# Altium PCB PCB尺子2.PcbDoc (part 1 of 3)
Units mm, origin at the board's own origin, x right, y up, seen from the top; angles counter-clockwise.
Board outline 210 x 35 mm, 2 copper layers (Top Layer, Bottom Layer); 21 components, 0 nets, 1047 pads, 0 vias.
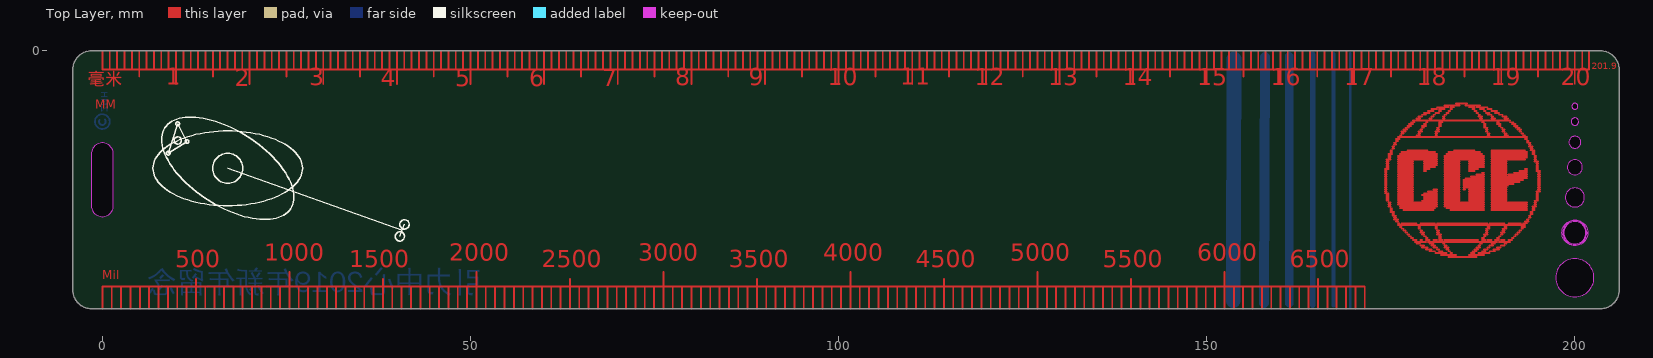
[diagram p0: Top Layer view]
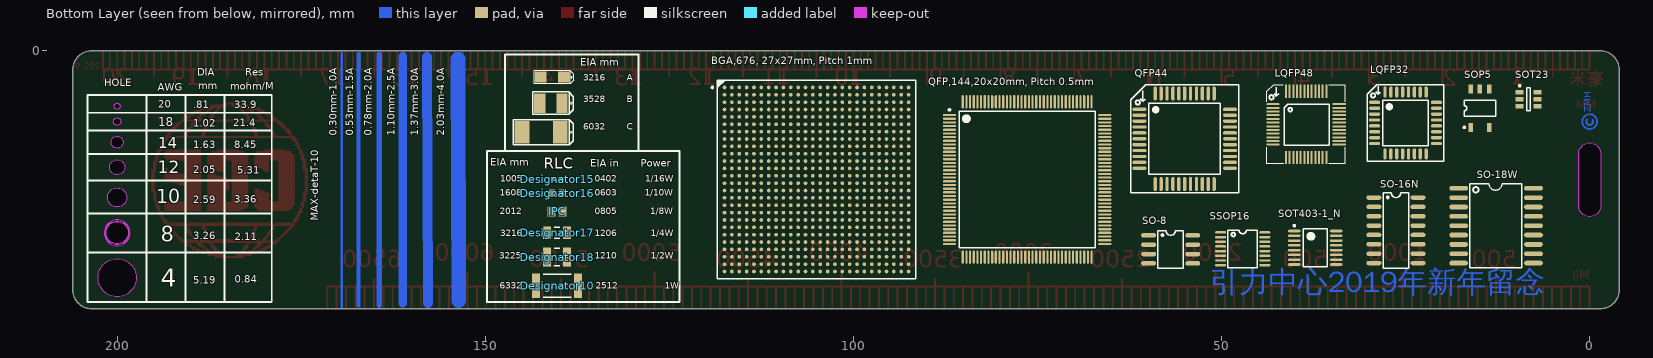
[diagram p1: Bottom Layer view, seen from below]

## Layer stack, top to bottom
Top Solder: solder mask 0.0102, Solder Resist, Dk 3.5
Top Layer: signal copper 0.0356
Dielectric 1: dielectric 0.32, FR-4, Dk 4.8
Bottom Layer: signal copper 0.0356
Bottom Solder: solder mask 0.0102, Solder Resist, Dk 3.5

## Board outline
-4,-32.5 -4,-2.5 cw(c-1.5,-2.5) -1.5,0 203.5,0 cw(c203.5,-2.5) 206,-2.5 206,-32.5 cw(c203.5,-32.5) 203.5,-35 -1.5,-35 cw(c-1.5,-32.5)
cut-out: -1.5,-21 ccw(c0,-21) 1.5,-21 1.5,-14 ccw(c0,-14) -1.5,-14
cut-out: 197.405,-30.8 ccw(c200,-30.8) 200,-33.395 ccw(c200,-30.8) 202.595,-30.8 ccw(c200,-30.8) 200,-28.205 ccw(c200,-30.8)
cut-out: 201.757,-24.73 cw(c200,-24.7) 201.757,-24.7 cw(c201.63,-24.7) 201.503,-24.7 ccw(c200,-24.7) 201.502,-24.725 cw(c201.63,-24.728) 201.757,-24.728 cw(c201.63,-24.728)
cut-out: 198.37,-24.7 ccw(c200,-24.7) 200,-26.33 ccw(c200,-24.7) 201.63,-24.7 ccw(c200,-24.7) 200,-23.07 ccw(c200,-24.7)
cut-out: 198.705,-19.9 ccw(c200,-19.9) 200,-21.195 ccw(c200,-19.9) 201.295,-19.9 ccw(c200,-19.9) 200,-18.605 ccw(c200,-19.9)
cut-out: 198.975,-15.8 ccw(c200,-15.8) 200,-16.825 ccw(c200,-15.8) 201.025,-15.8 ccw(c200,-15.8) 200,-14.775 ccw(c200,-15.8)
cut-out: 199.185,-12.4 ccw(c200,-12.4) 200,-13.215 ccw(c200,-12.4) 200.815,-12.4 ccw(c200,-12.4) 200,-11.585 ccw(c200,-12.4)
cut-out: 199.49,-9.6 ccw(c200,-9.6) 200,-10.11 ccw(c200,-9.6) 200.51,-9.6 ccw(c200,-9.6) 200,-9.09 ccw(c200,-9.6)
cut-out: 199.595,-7.525 ccw(c200,-7.525) 200,-7.93 ccw(c200,-7.525) 200.405,-7.525 ccw(c200,-7.525) 200,-7.12 ccw(c200,-7.525)
cut-out: 198.705,-19.9 ccw(c200,-19.9) 200,-21.195 ccw(c200,-19.9) 201.295,-19.9 ccw(c200,-19.9) 200,-18.605 ccw(c200,-19.9)
cut-out: 198.975,-15.8 ccw(c200,-15.8) 200,-16.825 ccw(c200,-15.8) 201.025,-15.8 ccw(c200,-15.8) 200,-14.775 ccw(c200,-15.8)
cut-out: 199.185,-12.4 ccw(c200,-12.4) 200,-13.215 ccw(c200,-12.4) 200.815,-12.4 ccw(c200,-12.4) 200,-11.585 ccw(c200,-12.4)
cut-out: 201.757,-24.73 cw(c200,-24.7) 201.757,-24.7 cw(c201.63,-24.7) 201.503,-24.7 ccw(c200,-24.7) 201.502,-24.725 cw(c201.63,-24.728) 201.757,-24.728 cw(c201.63,-24.728)
cut-out: 198.37,-24.7 ccw(c200,-24.7) 200,-26.33 ccw(c200,-24.7) 201.63,-24.7 ccw(c200,-24.7) 200,-23.07 ccw(c200,-24.7)
cut-out: 197.405,-30.8 ccw(c200,-30.8) 200,-33.395 ccw(c200,-30.8) 202.595,-30.8 ccw(c200,-30.8) 200,-28.205 ccw(c200,-30.8)
cut-out: -1.5,-21 ccw(c0,-21) 1.5,-21 1.5,-14 ccw(c0,-14) -1.5,-14
cut-out: 199.49,-9.6 ccw(c200,-9.6) 200,-10.11 ccw(c200,-9.6) 200.51,-9.6 ccw(c200,-9.6) 200,-9.09 ccw(c200,-9.6)
cut-out: 199.595,-7.525 ccw(c200,-7.525) 200,-7.93 ccw(c200,-7.525) 200.405,-7.525 ccw(c200,-7.525) 200,-7.12 ccw(c200,-7.525)

## Design rules (kind name [scope] priority, off if disabled: settings)
Clearance [All] p1: gap=0.254 ignorepadtopadclearanceinfootprint=FALSE except(0: Arc-Hole Track-Hole SMDPad-Hole THPad-Hole Via-Hole Fill-Hole Poly-Hole Region-Hole Text-Hole; 0.25: Arc-Via Track-Via; 0.55: Via-Via)
PolygonConnect [All] p1: connectstyle=Relief reliefconductorwidth=0.254 reliefentries=4 polygonreliefangle="90 Angle" airgapwidth=0.254
RoutingVias [All] p1: holewidth=0.711 width=1.27 viastyle="Through Hole" minholewidth=0.711 minwidth=1.27 maxholewidth=0.711 maxwidth=1.27
SolderMaskExpansion [All] p1: expansion=0.102
Width [All] p1: maxlimit=3 minlimit=0.2 preferedwidth=0.254
30 further rules are at their usual default settings.

## Components (designator, comment, footprint, x,y, rotation, side; value= is the part's Value field where it differs from the comment)
"BGA,676, 27x27mm, Pitch 1mm" "Comment" FG676 105,-17.457 r180 bottom
Designator10 "Comment" RESC6332 140.25,-31.9 r180 bottom
Designator15 "Comment" 0402 140.25,-17.4 r180 bottom
Designator16 "Comment" 1608[0603] 140.25,-19.3 r180 bottom
Designator17 "Comment" C1206 140.25,-24.7 r180 bottom
Designator18 "Comment" C1210 140.25,-28 r180 bottom
IPC "Comment" C0805 140.25,-21.8 r180 bottom
LQFP32 "Comment" LQFP32 25,-9.781 r180 bottom
LQFP48 "Comment" LQFP48 38.5,-9.981 r180 bottom
QFP44 "Comment" QFP44 55,-11.931 r180 bottom
"QFP,144,20x20mm, Pitch 0.5mm" "Comment" TQ144_N 76.4,-17.457 r180 bottom
SO-8 "Comment" SO-8 56.9,-26.951 r180 bottom
SO-16N "Comment" SO-16N 26.3,-24.36 r180 bottom
SO-18W "Comment" SO-18W 12.705,-23.738 r180 bottom
SOP5 "Comment" SOP5(6) 14.9,-7.781 r180 bottom
SOT23 "Comment" SOT23-6_N 8.304,-6.554 r180 bottom
SOT403-1_N "Comment" SOT403-1_N 37.263,-26.73 r180 bottom
SSOP16 "Comment" SSOP16-150mil-0.635mm 47.122,-26.875 r180 bottom
? "Comment" 钽电容A型 140.899,-3.557 r180 bottom
? "Comment" 钽电容B型 141.069,-7.1 r180 bottom
? "Comment" 钽电容C型 142.4,-11.05 r180 bottom

## Footprints (in the part's own frame and the unit in brackets; to place one, negate y for a bottom-side part, rotate by r counter-clockwise, add the part's x,y. Pads: shape width x height; smd on the part's side, far side on the other; paste and mask are expansions set on the pad)
0402 [mm] "Chip Capacitor, Body 1.0x0.5mm, IPC High Density"
  rect 0.6x0.5 smd: 1(-0.5,0) 2(0.5,0)
  body extent -0.55,-0.3 0.55,0.3, height 1.3
1608[0603] [mm] "Chip Capacitor, Body 1.6x0.8mm, IPC High Density"
  rect 0.8x0.9 smd: 1(-0.7,0) 2(0.7,0)
  body extent -0.87,-0.48 0.87,0.48, height 1.3
C0805 [mm] "Chip Capacitor, Body 2.0x1.3mm, IPC High Density"
  rect 1.1x1.4 smd: 1(-0.75,0) 2(0.75,0)
  body extent -1.1,-0.72 1.1,0.72, height 1.4
C1206 [mm] "Chip Capacitor, Body 3.2x1.6mm, IPC High Density"
  rect 1.1x1.7 smd: 1(-1.35,0) 2(1.35,0)
  silkscreen extent -0.4,-0.75 0.4,0.75, body extent -1.7,-0.9 1.7,0.9, height 1.3
C1210 [mm] "Chip Capacitor, Body 3.2x2.5mm, IPC High Density"
  rect 1.1x2.6 smd: 1(-1.35,0) 2(1.35,0)
  silkscreen extent -0.4,-1.2 0.4,1.2, body extent -1.7,-1.35 1.7,1.35, height 1.3
FG676 [mm] "BGA, 676-Leads, Body 27x27mm, Pitch 1mm"
  round 0.5 smd: A1(-12.5,12.5) A2(-11.5,12.5) A3(-10.5,12.5) A4(-9.5,12.5) A5(-8.5,12.5) A6(-7.5,12.5) A7(-6.5,12.5) A8(-5.5,12.5) A9(-4.5,12.5) A10(-3.5,12.5) A11(-2.5,12.5) A12(-1.5,12.5) A13(-0.5,12.5) A14(0.5,12.5) A15(1.5,12.5) A16(2.5,12.5) A17(3.5,12.5) A18(4.5,12.5) A19(5.5,12.5) A20(6.5,12.5) A21(7.5,12.5) A22(8.5,12.5) A23(9.5,12.5) A24(10.5,12.5) A25(11.5,12.5) A26(12.5,12.5) AA1(-12.5,-7.5) AA2(-11.5,-7.5) AA3(-10.5,-7.5) AA4(-9.5,-7.5) AA5(-8.5,-7.5) AA6(-7.5,-7.5) AA7(-6.5,-7.5) AA8(-5.5,-7.5) AA9(-4.5,-7.5) AA10(-3.5,-7.5) AA11(-2.5,-7.5) AA12(-1.5,-7.5) AA13(-0.5,-7.5) AA14(0.5,-7.5) AA15(1.5,-7.5) AA16(2.5,-7.5) AA17(3.5,-7.5) AA18(4.5,-7.5) AA19(5.5,-7.5) AA20(6.5,-7.5) AA21(7.5,-7.5) AA22(8.5,-7.5) AA23(9.5,-7.5) AA24(10.5,-7.5) AA25(11.5,-7.5) AA26(12.5,-7.5) AB1(-12.5,-8.5) AB2(-11.5,-8.5) AB3(-10.5,-8.5) AB4(-9.5,-8.5) AB5(-8.5,-8.5) AB6(-7.5,-8.5) AB7(-6.5,-8.5) AB8(-5.5,-8.5) AB9(-4.5,-8.5) AB10(-3.5,-8.5) AB11(-2.5,-8.5) AB12(-1.5,-8.5) AB13(-0.5,-8.5) AB14(0.5,-8.5) AB15(1.5,-8.5) AB16(2.5,-8.5) AB17(3.5,-8.5) AB18(4.5,-8.5) AB19(5.5,-8.5) AB20(6.5,-8.5) AB21(7.5,-8.5) AB22(8.5,-8.5) AB23(9.5,-8.5) AB24(10.5,-8.5) AB25(11.5,-8.5) AB26(12.5,-8.5) AC1(-12.5,-9.5) AC2(-11.5,-9.5) AC3(-10.5,-9.5) AC4(-9.5,-9.5) AC5(-8.5,-9.5) AC6(-7.5,-9.5) AC7(-6.5,-9.5) AC8(-5.5,-9.5) AC9(-4.5,-9.5) AC10(-3.5,-9.5) AC11(-2.5,-9.5) AC12(-1.5,-9.5) AC13(-0.5,-9.5) AC14(0.5,-9.5) AC15(1.5,-9.5) AC16(2.5,-9.5) AC17(3.5,-9.5) AC18(4.5,-9.5) AC19(5.5,-9.5) AC20(6.5,-9.5) AC21(7.5,-9.5) AC22(8.5,-9.5) AC23(9.5,-9.5) AC24(10.5,-9.5) AC25(11.5,-9.5) AC26(12.5,-9.5) AD1(-12.5,-10.5) AD2(-11.5,-10.5) AD3(-10.5,-10.5) AD4(-9.5,-10.5) AD5(-8.5,-10.5) AD6(-7.5,-10.5) AD7(-6.5,-10.5) AD8(-5.5,-10.5) AD9(-4.5,-10.5) AD10(-3.5,-10.5) AD11(-2.5,-10.5) AD12(-1.5,-10.5) AD13(-0.5,-10.5) AD14(0.5,-10.5) AD15(1.5,-10.5) AD16(2.5,-10.5) AD17(3.5,-10.5) AD18(4.5,-10.5) AD19(5.5,-10.5) AD20(6.5,-10.5) AD21(7.5,-10.5) AD22(8.5,-10.5) AD23(9.5,-10.5) AD24(10.5,-10.5) AD25(11.5,-10.5) AD26(12.5,-10.5) AE1(-12.5,-11.5) AE2(-11.5,-11.5) AE3(-10.5,-11.5) AE4(-9.5,-11.5) AE5(-8.5,-11.5) AE6(-7.5,-11.5) AE7(-6.5,-11.5) AE8(-5.5,-11.5) AE9(-4.5,-11.5) AE10(-3.5,-11.5) AE11(-2.5,-11.5) AE12(-1.5,-11.5) AE13(-0.5,-11.5) AE14(0.5,-11.5) AE15(1.5,-11.5) AE16(2.5,-11.5) AE17(3.5,-11.5) AE18(4.5,-11.5) AE19(5.5,-11.5) AE20(6.5,-11.5) AE21(7.5,-11.5) AE22(8.5,-11.5) AE23(9.5,-11.5) AE24(10.5,-11.5) AE25(11.5,-11.5) AE26(12.5,-11.5) AF1(-12.5,-12.5) AF2(-11.5,-12.5) AF3(-10.5,-12.5) AF4(-9.5,-12.5) AF5(-8.5,-12.5) AF6(-7.5,-12.5) AF7(-6.5,-12.5) AF8(-5.5,-12.5) AF9(-4.5,-12.5) AF10(-3.5,-12.5) AF11(-2.5,-12.5) AF12(-1.5,-12.5) AF13(-0.5,-12.5) AF14(0.5,-12.5) AF15(1.5,-12.5) AF16(2.5,-12.5) AF17(3.5,-12.5) AF18(4.5,-12.5) AF19(5.5,-12.5) AF20(6.5,-12.5) AF21(7.5,-12.5) AF22(8.5,-12.5) AF23(9.5,-12.5) AF24(10.5,-12.5) AF25(11.5,-12.5) AF26(12.5,-12.5) B1(-12.5,11.5) B2(-11.5,11.5) B3(-10.5,11.5) B4(-9.5,11.5) B5(-8.5,11.5) B6(-7.5,11.5) B7(-6.5,11.5) B8(-5.5,11.5) B9(-4.5,11.5) B10(-3.5,11.5) B11(-2.5,11.5) B12(-1.5,11.5) B13(-0.5,11.5) B14(0.5,11.5) B15(1.5,11.5) B16(2.5,11.5) B17(3.5,11.5) B18(4.5,11.5) B19(5.5,11.5) B20(6.5,11.5) B21(7.5,11.5) B22(8.5,11.5) B23(9.5,11.5) B24(10.5,11.5) B25(11.5,11.5) B26(12.5,11.5) C1(-12.5,10.5) C2(-11.5,10.5) C3(-10.5,10.5) C4(-9.5,10.5) C5(-8.5,10.5) C6(-7.5,10.5) C7(-6.5,10.5) C8(-5.5,10.5) C9(-4.5,10.5) C10(-3.5,10.5) C11(-2.5,10.5) C12(-1.5,10.5) C13(-0.5,10.5) C14(0.5,10.5) C15(1.5,10.5) C16(2.5,10.5) C17(3.5,10.5) C18(4.5,10.5) C19(5.5,10.5) C20(6.5,10.5) C21(7.5,10.5) C22(8.5,10.5) C23(9.5,10.5) C24(10.5,10.5) C25(11.5,10.5) C26(12.5,10.5) D1(-12.5,9.5) D2(-11.5,9.5) D3(-10.5,9.5) D4(-9.5,9.5) D5(-8.5,9.5) D6(-7.5,9.5) D7(-6.5,9.5) D8(-5.5,9.5) D9(-4.5,9.5) D10(-3.5,9.5) D11(-2.5,9.5) D12(-1.5,9.5) D13(-0.5,9.5) D14(0.5,9.5) D15(1.5,9.5) D16(2.5,9.5) D17(3.5,9.5) D18(4.5,9.5) D19(5.5,9.5) D20(6.5,9.5) D21(7.5,9.5) D22(8.5,9.5) D23(9.5,9.5) D24(10.5,9.5) D25(11.5,9.5) D26(12.5,9.5) E1(-12.5,8.5) E2(-11.5,8.5) E3(-10.5,8.5) E4(-9.5,8.5) E5(-8.5,8.5) E6(-7.5,8.5) E7(-6.5,8.5) E8(-5.5,8.5) E9(-4.5,8.5) E10(-3.5,8.5) E11(-2.5,8.5) E12(-1.5,8.5) E13(-0.5,8.5) E14(0.5,8.5) E15(1.5,8.5) E16(2.5,8.5) E17(3.5,8.5) E18(4.5,8.5) E19(5.5,8.5) E20(6.5,8.5) E21(7.5,8.5) E22(8.5,8.5) E23(9.5,8.5) E24(10.5,8.5) E25(11.5,8.5) E26(12.5,8.5) F1(-12.5,7.5) F2(-11.5,7.5) F3(-10.5,7.5) F4(-9.5,7.5) F5(-8.5,7.5) F6(-7.5,7.5) F7(-6.5,7.5) F8(-5.5,7.5) F9(-4.5,7.5) F10(-3.5,7.5) F11(-2.5,7.5) F12(-1.5,7.5) F13(-0.5,7.5) F14(0.5,7.5) F15(1.5,7.5) F16(2.5,7.5) F17(3.5,7.5) F18(4.5,7.5) F19(5.5,7.5) F20(6.5,7.5) F21(7.5,7.5) F22(8.5,7.5) F23(9.5,7.5) F24(10.5,7.5) F25(11.5,7.5) F26(12.5,7.5) G1(-12.5,6.5) G2(-11.5,6.5) G3(-10.5,6.5) G4(-9.5,6.5) G5(-8.5,6.5) G6(-7.5,6.5) G7(-6.5,6.5) G8(-5.5,6.5) G9(-4.5,6.5) G10(-3.5,6.5) G11(-2.5,6.5) G12(-1.5,6.5) G13(-0.5,6.5) G14(0.5,6.5) G15(1.5,6.5) G16(2.5,6.5) G17(3.5,6.5) G18(4.5,6.5) G19(5.5,6.5) G20(6.5,6.5) G21(7.5,6.5) G22(8.5,6.5) G23(9.5,6.5) G24(10.5,6.5) G25(11.5,6.5) G26(12.5,6.5) H1(-12.5,5.5) H2(-11.5,5.5) H3(-10.5,5.5) H4(-9.5,5.5) H5(-8.5,5.5) H6(-7.5,5.5) H7(-6.5,5.5) H8(-5.5,5.5) H9(-4.5,5.5) H10(-3.5,5.5) H11(-2.5,5.5) H12(-1.5,5.5) H13(-0.5,5.5) H14(0.5,5.5) H15(1.5,5.5) H16(2.5,5.5) H17(3.5,5.5) H18(4.5,5.5) H19(5.5,5.5) H20(6.5,5.5) H21(7.5,5.5) H22(8.5,5.5) H23(9.5,5.5) H24(10.5,5.5) H25(11.5,5.5) H26(12.5,5.5) J1(-12.5,4.5) J2(-11.5,4.5) J3(-10.5,4.5) J4(-9.5,4.5) J5(-8.5,4.5) J6(-7.5,4.5) J7(-6.5,4.5) J8(-5.5,4.5) J9(-4.5,4.5) J10(-3.5,4.5) J11(-2.5,4.5) J12(-1.5,4.5) J13(-0.5,4.5) J14(0.5,4.5) J15(1.5,4.5) J16(2.5,4.5) J17(3.5,4.5) J18(4.5,4.5) J19(5.5,4.5) J20(6.5,4.5) J21(7.5,4.5) J22(8.5,4.5) J23(9.5,4.5) J24(10.5,4.5) J25(11.5,4.5) J26(12.5,4.5) K1(-12.5,3.5) K2(-11.5,3.5) K3(-10.5,3.5) K4(-9.5,3.5) K5(-8.5,3.5) K6(-7.5,3.5) K7(-6.5,3.5) K8(-5.5,3.5) K9(-4.5,3.5) K10(-3.5,3.5) K11(-2.5,3.5) K12(-1.5,3.5) K13(-0.5,3.5) K14(0.5,3.5) K15(1.5,3.5) K16(2.5,3.5) K17(3.5,3.5) K18(4.5,3.5) K19(5.5,3.5) K20(6.5,3.5) K21(7.5,3.5) K22(8.5,3.5) K23(9.5,3.5) K24(10.5,3.5) K25(11.5,3.5) K26(12.5,3.5) L1(-12.5,2.5) L2(-11.5,2.5) L3(-10.5,2.5) L4(-9.5,2.5) L5(-8.5,2.5) L6(-7.5,2.5) L7(-6.5,2.5) L8(-5.5,2.5) L9(-4.5,2.5) L10(-3.5,2.5) L11(-2.5,2.5) L12(-1.5,2.5) L13(-0.5,2.5) L14(0.5,2.5) L15(1.5,2.5) L16(2.5,2.5) L17(3.5,2.5) L18(4.5,2.5) L19(5.5,2.5) L20(6.5,2.5) L21(7.5,2.5) L22(8.5,2.5) L23(9.5,2.5) L24(10.5,2.5) L25(11.5,2.5) L26(12.5,2.5) M1(-12.5,1.5) M2(-11.5,1.5) M3(-10.5,1.5) M4(-9.5,1.5) M5(-8.5,1.5) M6(-7.5,1.5) M7(-6.5,1.5) M8(-5.5,1.5) M9(-4.5,1.5) M10(-3.5,1.5) M11(-2.5,1.5) M12(-1.5,1.5) M13(-0.5,1.5) M14(0.5,1.5) M15(1.5,1.5) M16(2.5,1.5) M17(3.5,1.5) M18(4.5,1.5) M19(5.5,1.5) M20(6.5,1.5) M21(7.5,1.5) M22(8.5,1.5) M23(9.5,1.5) M24(10.5,1.5) M25(11.5,1.5) M26(12.5,1.5) N1(-12.5,0.5) N2(-11.5,0.5) N3(-10.5,0.5) N4(-9.5,0.5) N5(-8.5,0.5) N6(-7.5,0.5) N7(-6.5,0.5) N8(-5.5,0.5) N9(-4.5,0.5) N10(-3.5,0.5) N11(-2.5,0.5) N12(-1.5,0.5) N13(-0.5,0.5) N14(0.5,0.5) N15(1.5,0.5) N16(2.5,0.5) N17(3.5,0.5) N18(4.5,0.5) N19(5.5,0.5) N20(6.5,0.5) N21(7.5,0.5) N22(8.5,0.5) N23(9.5,0.5) N24(10.5,0.5) N25(11.5,0.5) N26(12.5,0.5) P1(-12.5,-0.5) P2(-11.5,-0.5) P3(-10.5,-0.5) P4(-9.5,-0.5) P5(-8.5,-0.5) P6(-7.5,-0.5) P7(-6.5,-0.5) P8(-5.5,-0.5) P9(-4.5,-0.5) P10(-3.5,-0.5) P11(-2.5,-0.5) P12(-1.5,-0.5) P13(-0.5,-0.5) P14(0.5,-0.5) P15(1.5,-0.5) P16(2.5,-0.5) P17(3.5,-0.5) P18(4.5,-0.5) P19(5.5,-0.5) P20(6.5,-0.5) P21(7.5,-0.5) P22(8.5,-0.5) P23(9.5,-0.5) P24(10.5,-0.5) P25(11.5,-0.5) P26(12.5,-0.5) R1(-12.5,-1.5) R2(-11.5,-1.5) R3(-10.5,-1.5) R4(-9.5,-1.5) R5(-8.5,-1.5) R6(-7.5,-1.5) R7(-6.5,-1.5) R8(-5.5,-1.5) R9(-4.5,-1.5) R10(-3.5,-1.5) R11(-2.5,-1.5) R12(-1.5,-1.5) R13(-0.5,-1.5) R14(0.5,-1.5) R15(1.5,-1.5) R16(2.5,-1.5) R17(3.5,-1.5) R18(4.5,-1.5) R19(5.5,-1.5) R20(6.5,-1.5) R21(7.5,-1.5) R22(8.5,-1.5) R23(9.5,-1.5) R24(10.5,-1.5) R25(11.5,-1.5) R26(12.5,-1.5) T1(-12.5,-2.5) T2(-11.5,-2.5) T3(-10.5,-2.5) T4(-9.5,-2.5) T5(-8.5,-2.5) T6(-7.5,-2.5) T7(-6.5,-2.5) T8(-5.5,-2.5) T9(-4.5,-2.5) T10(-3.5,-2.5) T11(-2.5,-2.5) T12(-1.5,-2.5) T13(-0.5,-2.5) T14(0.5,-2.5) T15(1.5,-2.5) T16(2.5,-2.5) T17(3.5,-2.5) T18(4.5,-2.5) T19(5.5,-2.5) T20(6.5,-2.5) T21(7.5,-2.5) T22(8.5,-2.5) T23(9.5,-2.5) T24(10.5,-2.5) T25(11.5,-2.5) T26(12.5,-2.5) U1(-12.5,-3.5) U2(-11.5,-3.5) U3(-10.5,-3.5) U4(-9.5,-3.5) U5(-8.5,-3.5) U6(-7.5,-3.5) U7(-6.5,-3.5) U8(-5.5,-3.5) U9(-4.5,-3.5) U10(-3.5,-3.5) U11(-2.5,-3.5) U12(-1.5,-3.5) U13(-0.5,-3.5) U14(0.5,-3.5) U15(1.5,-3.5) U16(2.5,-3.5) U17(3.5,-3.5) U18(4.5,-3.5) U19(5.5,-3.5) U20(6.5,-3.5) U21(7.5,-3.5) U22(8.5,-3.5) U23(9.5,-3.5) U24(10.5,-3.5) U25(11.5,-3.5) U26(12.5,-3.5) V1(-12.5,-4.5) V2(-11.5,-4.5) V3(-10.5,-4.5) V4(-9.5,-4.5) V5(-8.5,-4.5) V6(-7.5,-4.5) V7(-6.5,-4.5) V8(-5.5,-4.5) V9(-4.5,-4.5) V10(-3.5,-4.5) V11(-2.5,-4.5) V12(-1.5,-4.5) V13(-0.5,-4.5) V14(0.5,-4.5) V15(1.5,-4.5) V16(2.5,-4.5) V17(3.5,-4.5) V18(4.5,-4.5) V19(5.5,-4.5) V20(6.5,-4.5) V21(7.5,-4.5) V22(8.5,-4.5) V23(9.5,-4.5) V24(10.5,-4.5) V25(11.5,-4.5) V26(12.5,-4.5) W1(-12.5,-5.5) W2(-11.5,-5.5) W3(-10.5,-5.5) W4(-9.5,-5.5) W5(-8.5,-5.5) W6(-7.5,-5.5) W7(-6.5,-5.5) W8(-5.5,-5.5) W9(-4.5,-5.5) W10(-3.5,-5.5) W11(-2.5,-5.5) W12(-1.5,-5.5) W13(-0.5,-5.5) W14(0.5,-5.5) W15(1.5,-5.5) W16(2.5,-5.5) W17(3.5,-5.5) W18(4.5,-5.5) W19(5.5,-5.5) W20(6.5,-5.5) W21(7.5,-5.5) W22(8.5,-5.5) W23(9.5,-5.5) W24(10.5,-5.5) W25(11.5,-5.5) W26(12.5,-5.5) Y1(-12.5,-6.5) Y2(-11.5,-6.5) Y3(-10.5,-6.5) Y4(-9.5,-6.5) Y5(-8.5,-6.5) Y6(-7.5,-6.5) Y7(-6.5,-6.5) Y8(-5.5,-6.5) Y9(-4.5,-6.5) Y10(-3.5,-6.5) Y11(-2.5,-6.5) Y12(-1.5,-6.5) Y13(-0.5,-6.5) Y14(0.5,-6.5) Y15(1.5,-6.5) Y16(2.5,-6.5) Y17(3.5,-6.5) Y18(4.5,-6.5) Y19(5.5,-6.5) Y20(6.5,-6.5) Y21(7.5,-6.5) Y22(8.5,-6.5) Y23(9.5,-6.5) Y24(10.5,-6.5) Y25(11.5,-6.5) Y26(12.5,-6.5)
  silkscreen extent -14.28,-13.5 13.5,13.5, body extent -13.5,-13.5 13.5,13.5, height 2.6
LQFP32 [mm]
  oval 1.5x0.45 smd: 1(-4.2,2.8) 2(-4.2,2) 3(-4.2,1.2) 4(-4.2,0.4) 5(-4.2,-0.4) 6(-4.2,-1.2) 7(-4.2,-2) 8(-4.2,-2.8) 17(4.2,-2.8) 18(4.2,-2) 19(4.2,-1.2) 20(4.2,-0.4) 21(4.2,0.4) 22(4.2,1.2) 23(4.2,2) 24(4.2,2.8)
  oval 0.45x1.5 smd: 9(-2.8,-4.2) 10(-2,-4.2) 11(-1.2,-4.2) 12(-0.4,-4.2) 13(0.4,-4.2) 14(1.2,-4.2) 15(2,-4.2) 16(2.8,-4.2) 25(2.8,4.2) 26(2,4.2) 27(1.2,4.2) 28(0.4,4.2) 29(-0.4,4.2) 30(-1.2,4.2) 31(-2,4.2) 32(-2.8,4.2)
  silkscreen extent -5.2,-5.2 5.2,5.2
LQFP48 [mm]
  oval 1.8x0.27 smd: 1(-4.5,2.75)
  rect 1.8x0.27 smd: 2(-4.5,2.25) 3(-4.5,1.75) 4(-4.5,1.25) 5(-4.5,0.75) 6(-4.5,0.25) 7(-4.5,-0.25) 8(-4.5,-0.75) 9(-4.5,-1.25) 10(-4.5,-1.75) 11(-4.5,-2.25) 12(-4.5,-2.75) 25(4.5,-2.75) 26(4.5,-2.25) 27(4.5,-1.75) 28(4.5,-1.25) 29(4.5,-0.75) 30(4.5,-0.25) 31(4.5,0.25) 32(4.5,0.75) 33(4.5,1.25) 34(4.5,1.75) 35(4.5,2.25) 36(4.5,2.75)
  rect 0.27x1.8 smd: 13(-2.75,-4.5) 14(-2.25,-4.5) 15(-1.75,-4.5) 16(-1.25,-4.5) 17(-0.75,-4.5) 18(-0.25,-4.5) 19(0.25,-4.5) 20(0.75,-4.5) 21(1.25,-4.5) 22(1.75,-4.5) 23(2.25,-4.5) 24(2.75,-4.5) 37(2.75,4.5) 38(2.25,4.5) 39(1.75,4.5) 40(1.25,4.5) 41(0.75,4.5) 42(0.25,4.5) 43(-0.25,4.5) 44(-0.75,4.5) 45(-1.25,4.5) 46(-1.75,4.5) 47(-2.25,4.5) 48(-2.75,4.5)
  silkscreen extent -5.32,-5.32 5.32,5.32, body extent -4.8,-4.8 4.8,4.8, height 1.5
QFP44 [mm]
  oval 1.9x0.45 smd: 1(-6.15,4) 2(-6.15,3.2) 3(-6.15,2.4) 4(-6.15,1.6) 5(-6.15,0.8) 6(-6.15,0) 7(-6.15,-0.8) 8(-6.15,-1.6) 9(-6.15,-2.4) 10(-6.15,-3.2) 11(-6.15,-4) 23(6.15,-4) 24(6.15,-3.2) 25(6.15,-2.4) 26(6.15,-1.6) 27(6.15,-0.8) 28(6.15,0) 29(6.15,0.8) 30(6.15,1.6) 31(6.15,2.4) 32(6.15,3.2) 33(6.15,4)
  oval 0.45x1.9 smd: 12(-4,-6.15) 13(-3.2,-6.15) 14(-2.4,-6.15) 15(-1.6,-6.15) 16(-0.8,-6.15) 17(0,-6.15) 18(0.8,-6.15) 19(1.6,-6.15) 20(2.4,-6.15) 21(3.2,-6.15) 22(4,-6.15) 34(4,6.15) 35(3.2,6.15) 36(2.4,6.15) 37(1.6,6.15) 38(0.8,6.15) 39(0,6.15) 40(-0.8,6.15) 41(-1.6,6.15) 42(-2.4,6.15) 43(-3.2,6.15) 44(-4,6.15)
  silkscreen extent -7.35,-7.35 7.35,7.35
RESC6332 [mm] "Chip Resistor, Body 6.3x3.2mm, IPC High Density"
  rect 1.1x3.3 smd: 1(-2.85,0) 2(2.85,0)
  silkscreen extent -1.9,-1.55 1.9,1.55, body extent -3.22,-1.68 3.22,1.68, height 0.9
SO-8 [mil]
  oval 80x24 smd: 1(-118,75) 2(-118,25) 3(-118,-25) 4(-118,-75) 5(118,-75) 6(118,-25) 7(118,25) 8(118,75)
  silkscreen extent -68,-100 68,100, body extent -117,-96 119,96, height 69
SO-16N [mil]
  oval 80x24 smd: 1(-118,175) 2(-118,125) 3(-118,75) 4(-118,25) 5(-118,-25) 6(-118,-75) 7(-118,-125) 8(-118,-175) 9(118,-175) 10(118,-125) 11(118,-75) 12(118,-25) 13(118,25) 14(118,75) 15(118,125) 16(118,175)
  silkscreen extent -68,-202 68,200, body extent -118,-202 118,202, height 70
SO-18W [mm]
  oval 2.54x0.65 smd: 1(-5.08,5.08) 2(-5.08,3.81) 3(-5.08,2.54) 4(-5.08,1.27) 5(-5.08,0) 6(-5.08,-1.27) 7(-5.08,-2.54) 8(-5.08,-3.81) 9(-5.08,-5.08) 10(5.08,-5.08) 11(5.08,-3.81) 12(5.08,-2.54) 13(5.08,-1.27) 14(5.08,0) 15(5.08,1.27) 16(5.08,2.54) 17(5.08,3.81) 18(5.08,5.08)
  silkscreen extent -3.61,-5.72 3.49,5.72, body extent -5.08,-5.84 5.23,5.77, height 2.54
SOP5(6) [mm] "Small Outline; 6 Leads (1 Absent); Body Width 4.4 mm; Pitch 1.27 mm"
  rect 0.6x1.2 smd: 1(-1.27,-2.6) 3(1.27,-2.6) 4(1.27,2.6) 5(0,2.6) 6(-1.27,2.6)
  silkscreen extent -2.24,-2.72 2.15,1.1
SOT23-6_N [mm] "SOT23, 6-Leads, Body 2.9x1.6mm, Pitch 0.95mm, Lead Span 2.7mm, IPC Medium Density"
  rect 1.1x0.65 smd: 1(-1.2,0.95) 2(-1.2,0) 3(-1.2,-0.95) 4(1.2,-0.95) 5(1.2,0) 6(1.2,0.95)
  silkscreen extent -1.33,-1.55 0.25,1.95, body extent -0.9,-1.55 0.9,1.55, height 1.45
SOT403-1_N [mm] "TSOP, 16-Leads, Body 5x4.4mm, Pitch 0.65mm, IPC Medium Density"
  oval 1.7x0.35 smd: 1(-2.85,2.275) 2(-2.85,1.625) 3(-2.85,0.975) 4(-2.85,0.325) 5(-2.85,-0.325) 6(-2.85,-0.975) 7(-2.85,-1.625) 8(-2.85,-2.275) 9(2.85,-2.275) 10(2.85,-1.625) 11(2.85,-0.975) 12(2.85,-0.325) 13(2.85,0.325) 14(2.85,0.975) 15(2.85,1.625) 16(2.85,2.275)
  silkscreen extent -2.98,-2.55 1.6,3.12, body extent -2.25,-2.55 2.25,2.55, height 1.1
SSOP16-150mil-0.635mm [mm] "贴片IC"
  oval 1.5x0.33 smd: 1(-3,2.223) 2(-3,1.588) 3(-3,0.953) 4(-3,0.318) 5(-3,-0.317) 6(-3,-0.952) 7(-3,-1.587) 8(-3,-2.222) 9(3,-2.223) 10(3,-1.588) 11(3,-0.953) 12(3,-0.318) 13(3,0.317) 14(3,0.952) 15(3,1.587) 16(3,2.222)
  silkscreen extent -2.01,-2.54 1.98,2.54, body extent -3,-2.7 3,2.7, height 1.11
TQ144_N [mm] "Thin QFP, 144-Leads, Body 20x20mm, Pitch 0.5mm, IPC Medium Density"
  oval 1.8x0.3 smd: 1(-10.55,8.75) 2(-10.55,8.25) 3(-10.55,7.75) 4(-10.55,7.25) 5(-10.55,6.75) 6(-10.55,6.25) 7(-10.55,5.75) 8(-10.55,5.25) 9(-10.55,4.75) 10(-10.55,4.25) 11(-10.55,3.75) 12(-10.55,3.25) 13(-10.55,2.75) 14(-10.55,2.25) 15(-10.55,1.75) 16(-10.55,1.25) 17(-10.55,0.75) 18(-10.55,0.25) 19(-10.55,-0.25) 20(-10.55,-0.75) 21(-10.55,-1.25) 22(-10.55,-1.75) 23(-10.55,-2.25) 24(-10.55,-2.75) 25(-10.55,-3.25) 26(-10.55,-3.75) 27(-10.55,-4.25) 28(-10.55,-4.75) 29(-10.55,-5.25) 30(-10.55,-5.75) 31(-10.55,-6.25) 32(-10.55,-6.75) 33(-10.55,-7.25) 34(-10.55,-7.75) 35(-10.55,-8.25) 36(-10.55,-8.75) 73(10.55,-8.75) 74(10.55,-8.25) 75(10.55,-7.75) 76(10.55,-7.25) 77(10.55,-6.75) 78(10.55,-6.25) 79(10.55,-5.75) 80(10.55,-5.25) 81(10.55,-4.75) 82(10.55,-4.25) 83(10.55,-3.75) 84(10.55,-3.25) 85(10.55,-2.75) 86(10.55,-2.25) 87(10.55,-1.75) 88(10.55,-1.25) 89(10.55,-0.75) 90(10.55,-0.25) 91(10.55,0.25) 92(10.55,0.75) 93(10.55,1.25) 94(10.55,1.75) 95(10.55,2.25) 96(10.55,2.75) 97(10.55,3.25) 98(10.55,3.75) 99(10.55,4.25) 100(10.55,4.75) 101(10.55,5.25) 102(10.55,5.75) 103(10.55,6.25) 104(10.55,6.75) 105(10.55,7.25) 106(10.55,7.75) 107(10.55,8.25) 108(10.55,8.75)
  oval 0.3x1.8 smd: 37(-8.75,-10.55) 38(-8.25,-10.55) 39(-7.75,-10.55) 40(-7.25,-10.55) 41(-6.75,-10.55) 42(-6.25,-10.55) 43(-5.75,-10.55) 44(-5.25,-10.55) 45(-4.75,-10.55) 46(-4.25,-10.55) 47(-3.75,-10.55) 48(-3.25,-10.55) 49(-2.75,-10.55) 50(-2.25,-10.55) 51(-1.75,-10.55) 52(-1.25,-10.55) 53(-0.75,-10.55) 54(-0.25,-10.55) 55(0.25,-10.55) 56(0.75,-10.55) 57(1.25,-10.55) 58(1.75,-10.55) 59(2.25,-10.55) 60(2.75,-10.55) 61(3.25,-10.55) 62(3.75,-10.55) 63(4.25,-10.55) 64(4.75,-10.55) 65(5.25,-10.55) 66(5.75,-10.55) 67(6.25,-10.55) 68(6.75,-10.55) 69(7.25,-10.55) 70(7.75,-10.55) 71(8.25,-10.55) 72(8.75,-10.55) 109(8.75,10.55) 110(8.25,10.55) 111(7.75,10.55) 112(7.25,10.55) 113(6.75,10.55) 114(6.25,10.55) 115(5.75,10.55) 116(5.25,10.55) 117(4.75,10.55) 118(4.25,10.55) 119(3.75,10.55) 120(3.25,10.55) 121(2.75,10.55) 122(2.25,10.55) 123(1.75,10.55) 124(1.25,10.55) 125(0.75,10.55) 126(0.25,10.55) 127(-0.25,10.55) 128(-0.75,10.55) 129(-1.25,10.55) 130(-1.75,10.55) 131(-2.25,10.55) 132(-2.75,10.55) 133(-3.25,10.55) 134(-3.75,10.55) 135(-4.25,10.55) 136(-4.75,10.55) 137(-5.25,10.55) 138(-5.75,10.55) 139(-6.25,10.55) 140(-6.75,10.55) 141(-7.25,10.55) 142(-7.75,10.55) 143(-8.25,10.55) 144(-8.75,10.55)
  silkscreen extent -10.68,-9.25 9.25,9.57, body extent -10,-10 10,10, height 1.6
钽电容A型 [mm] "钽电容A型"
  rect 1.5x1.5 smd: A(1.562,0) K(-1.562,0)
  silkscreen extent -2.48,-0.9 2.91,0.9, body extent -1.7,-0.84 1.75,0.86, height 1.61
钽电容B型 [mm] "钽电容B型"
  rect 1.5x2.6 smd: A(1.524,0) K(-1.524,0)
  silkscreen extent -2.49,-1.52 3.05,1.52, body extent -1.72,-1.25 1.83,1.27, height 1.61
钽电容C型 [mm] "钽电容C型"
  rect 2x3 smd: A(2.603,0) K(-2.603,0)
  silkscreen extent -3.82,-1.71 4.38,1.71, body extent -2.61,-1.58 2.61,1.59, height 1.61